# Altium PCB mchf_pro_ui.PcbDoc (part 3 of 7)
Units mil, origin at the board's own origin, x right, y up, seen from the top; angles counter-clockwise.
Board outline 7877.73 x 5661.04 mil, 2 copper layers (Top Layer, Bottom Layer); 345 components, 345 nets, 1318 pads, 783 vias.
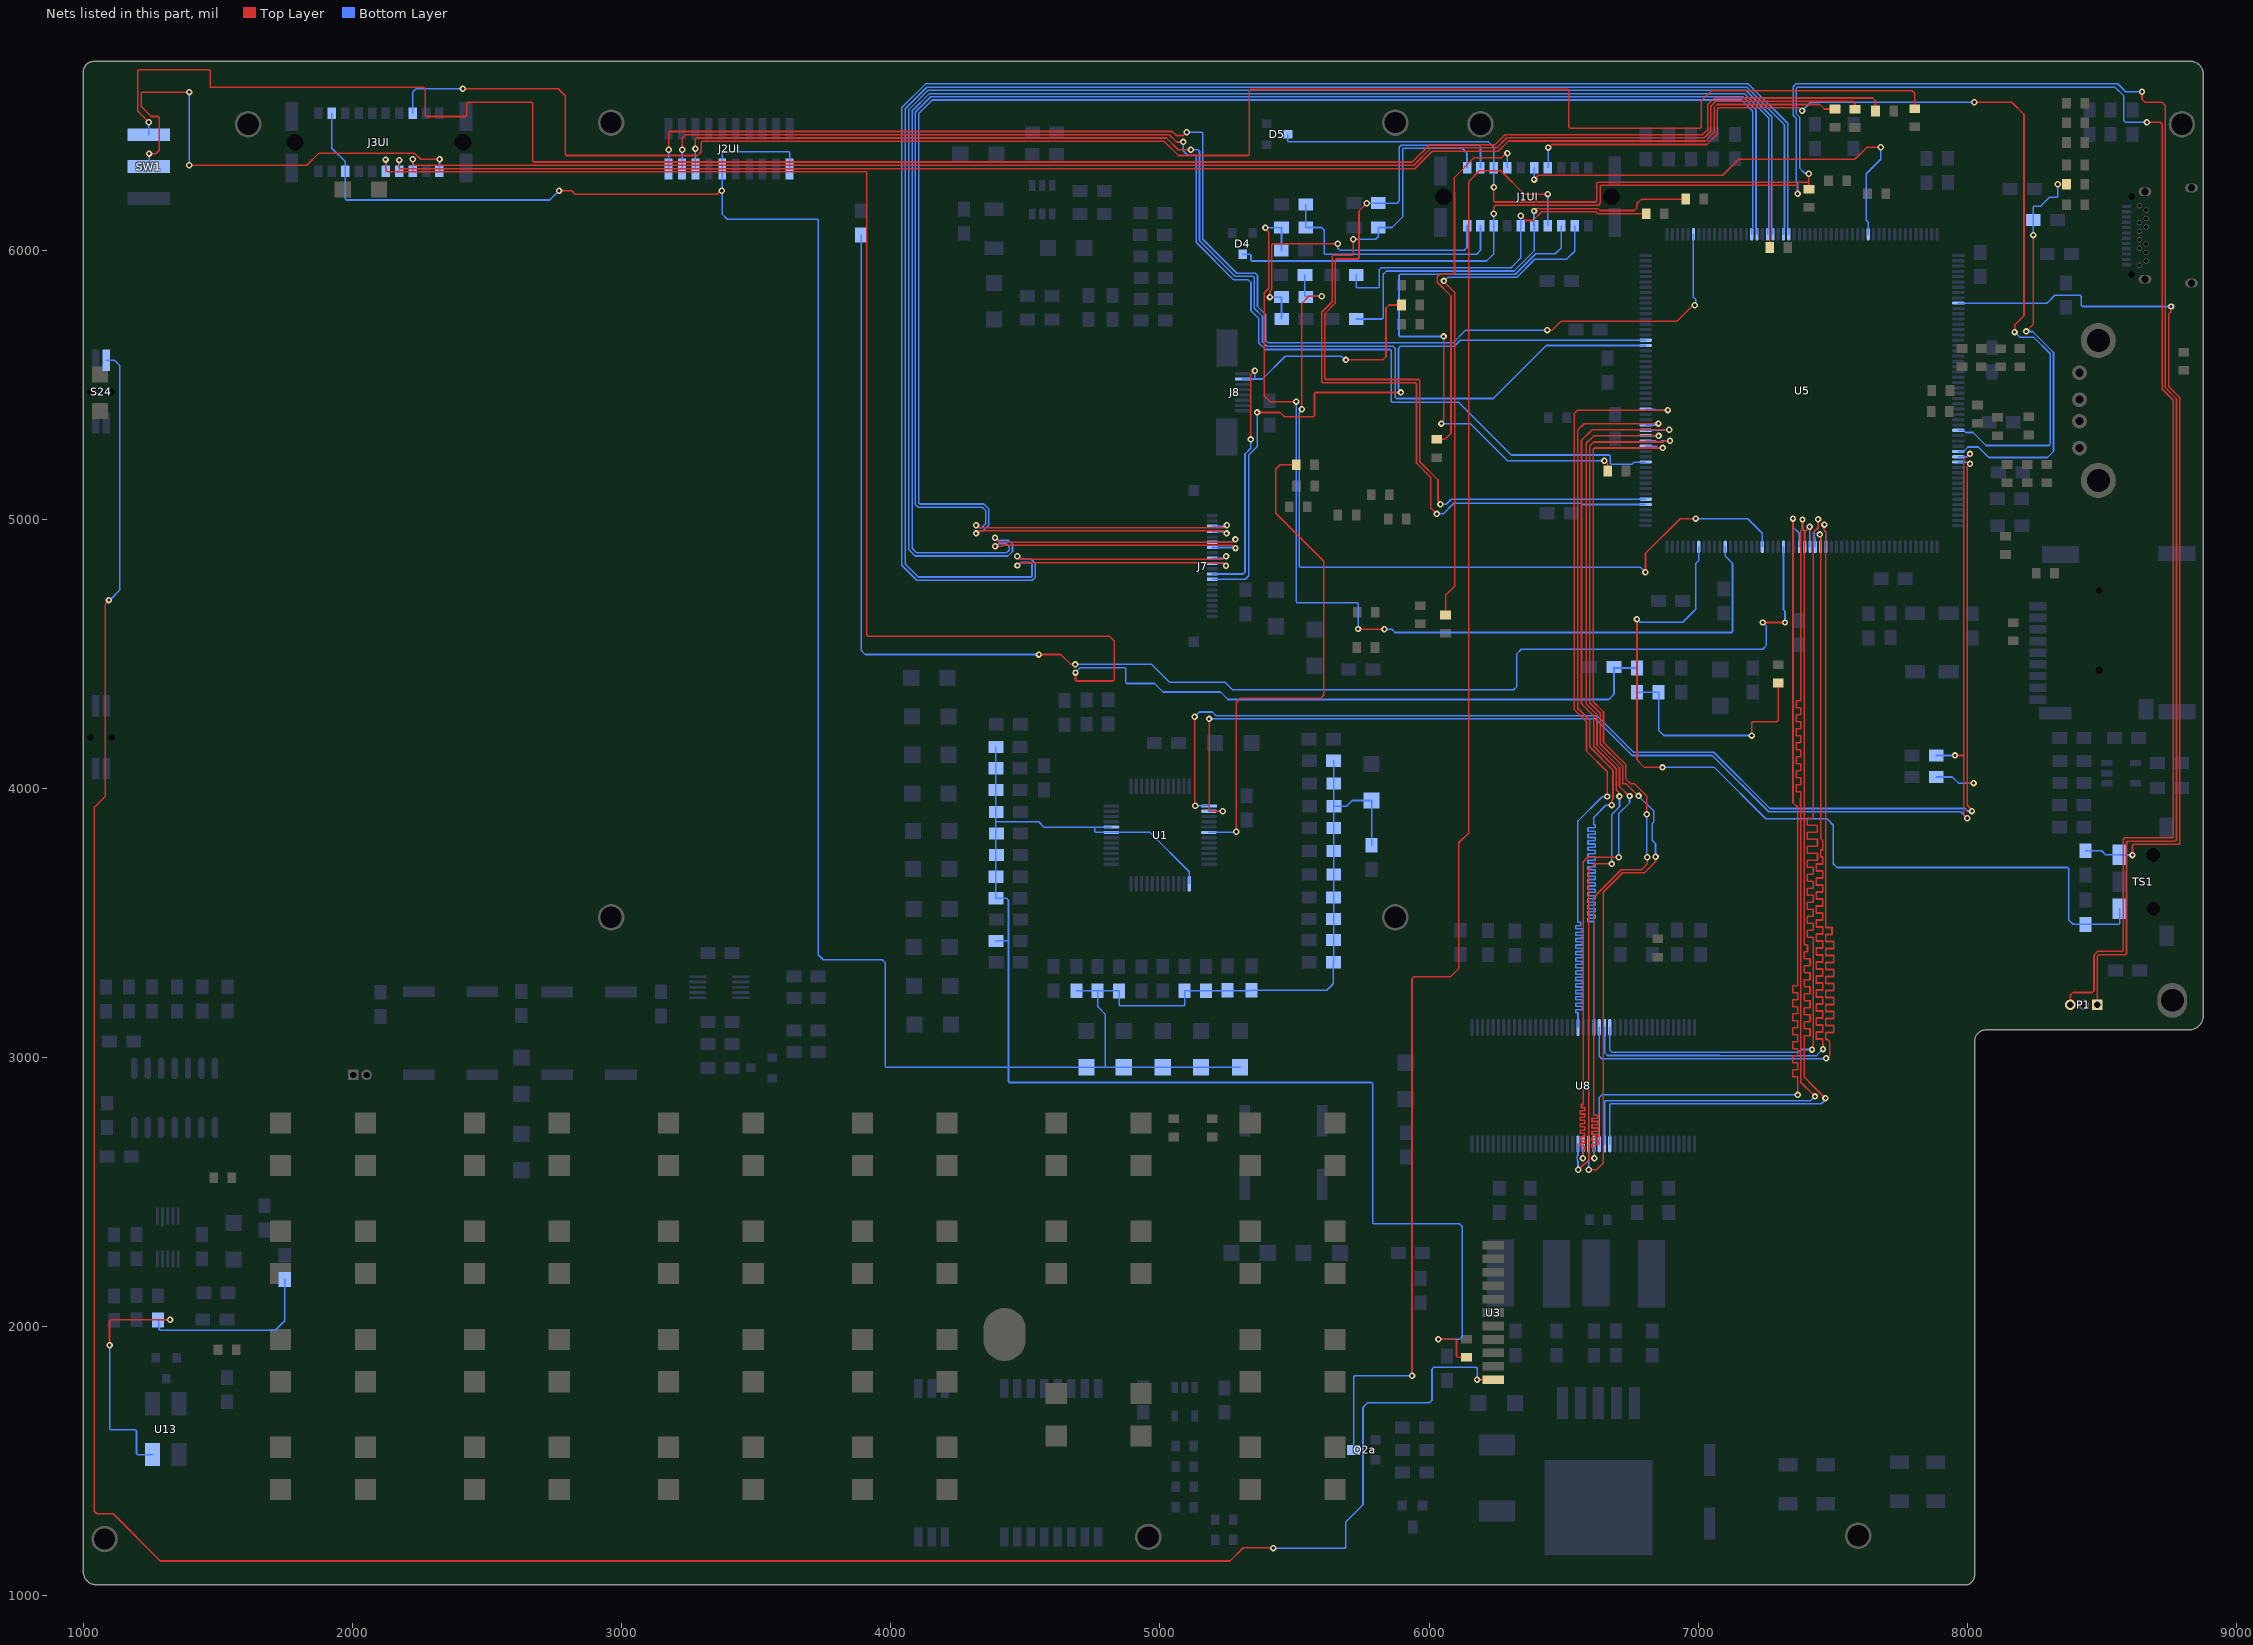
[diagram p2: the nets of this part, all layers, seen from the top]

## Via types
v1: diameter 24, hole 12, Top Layer to Bottom Layer, 779 vias
v2: diameter 30, hole 15, Top Layer to Bottom Layer, 4 vias

## Nets (pads, with @x,y where several pads share a name; then routed paths per layer and width w, separated by ;. In a path a pad name is that pad's centre, name@x,y a point inside that pad or via, vN(x,y) a via of type N, cw(c..) or ccw(c..) an arc to the next point about the centre after c; other vN are vias at no path point) (continued)
FMC_A11: (continued)
  Bottom Layer w6: U8.21@6553.39,3112.61 6553.39,3163.78 6553.39,3166.78 6545.71,3166.78 6545.71,3178.78 6570.09,3178.78 6570.09,3190.78 6545.71,3190.78 6545.71,3202.78 6570.09,3202.78 6570.09,3214.78 6545.71,3214.78 6545.71,3226.78 6570.09,3226.78 6570.09,3238.78 6545.71,3238.78 6545.71,3250.78 6570.09,3250.78 6570.09,3262.78 6545.71,3262.78 6545.71,3274.78 6570.09,3274.78 6570.09,3286.78 6545.71,3286.78 6545.71,3298.78 6570.09,3298.78 6570.09,3310.78 6545.71,3310.78 6545.71,3322.78 6570.09,3322.78 6570.09,3334.78 6545.71,3334.78 6545.71,3346.78 6570.09,3346.78 6570.09,3358.78 6545.71,3358.78 6545.71,3370.78 6570.09,3370.78 6570.09,3382.78 6545.71,3382.78 6545.71,3394.78 6570.09,3394.78 6570.09,3406.78 6545.71,3406.78 6545.71,3418.78 6570.09,3418.78 6570.09,3430.78 6545.71,3430.78 6545.71,3442.78 6570.09,3442.78 6570.09,3454.78 6545.71,3454.78 6545.71,3466.78 6570.09,3466.78 6570.09,3478.78 6545.71,3478.78 6545.71,3490.78 6563.3,3490.78 6563.3,3502.78 6553.12,3502.78 6553.11,3509.28 6553.11,3512.28 6553.11,3879.66 6643.23,3969.78 v1@6662.45,3969.78 ; U5.75@6805.08,5410.02 6837.45,5410.02 6841.2,5406.27 v1(6887.49,5406.27)